# EAGLE board Project_Czepil_Zwolinska (EAGLE 9.2.2)
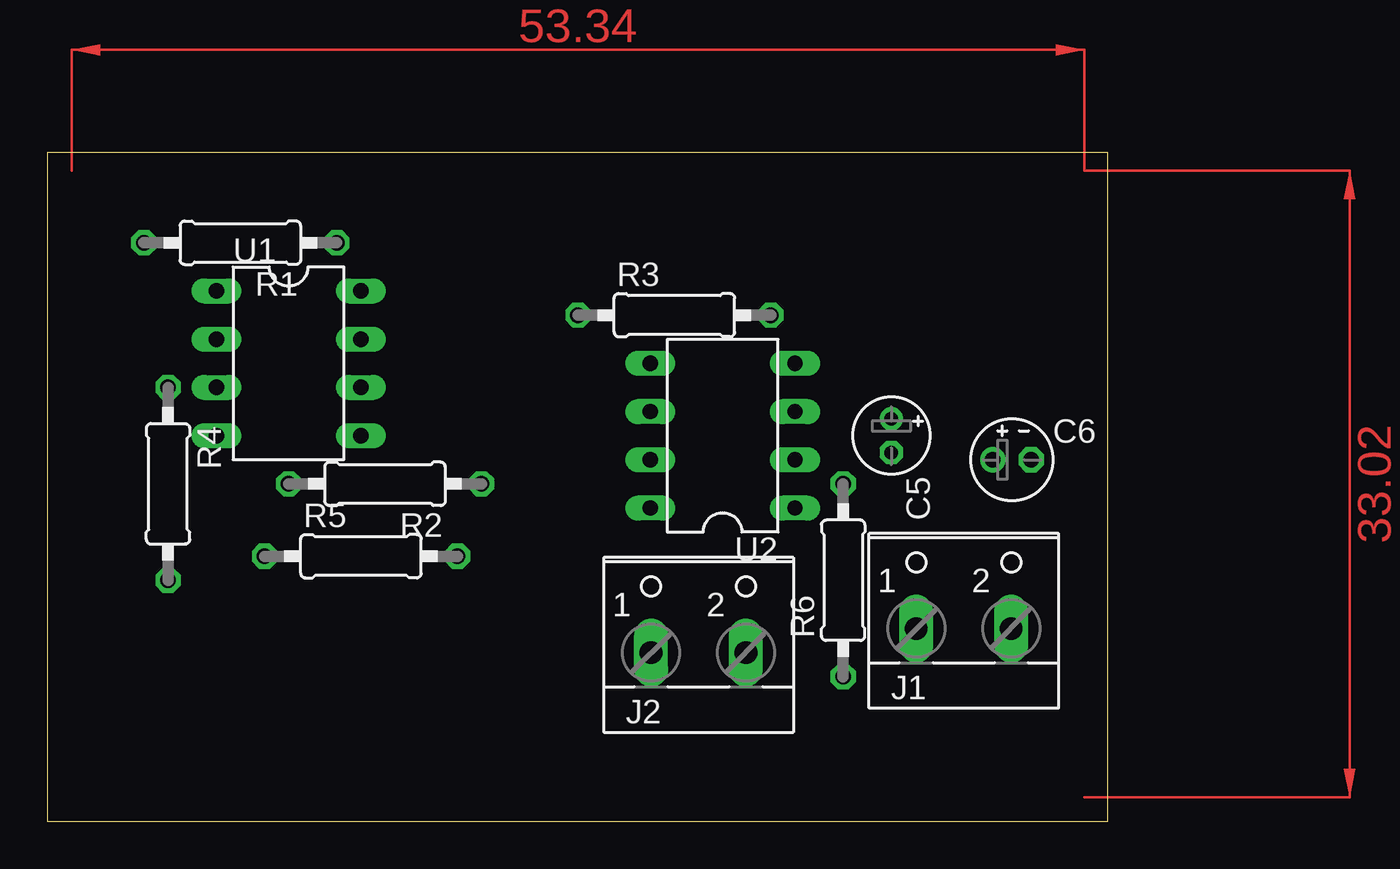
[diagram p0: board, top side]
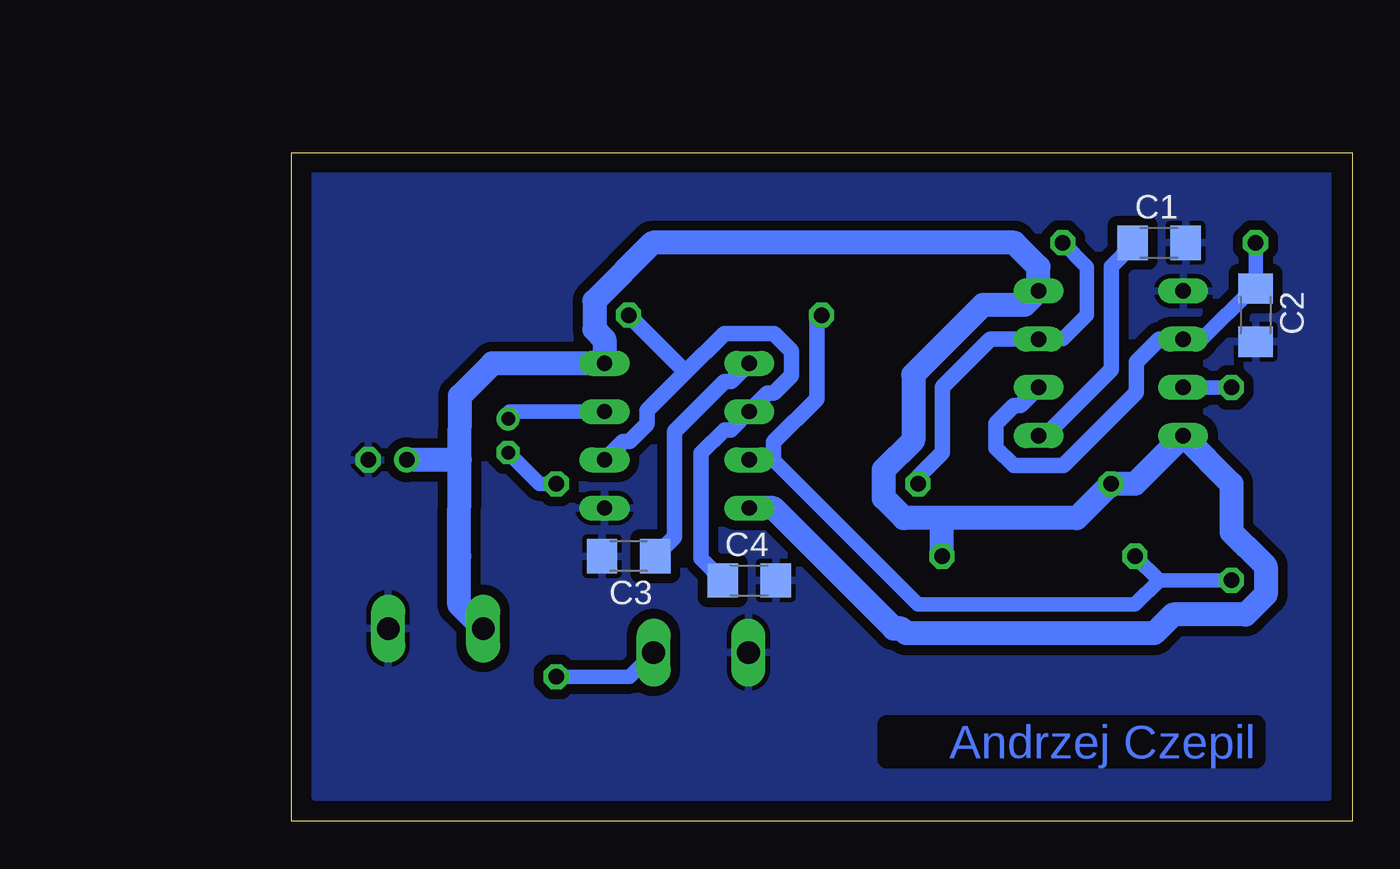
[diagram p1: board, bottom side, seen from below]

Size 55.86 x 35.23 mm. Coordinates in mm from the lower left corner, seen from the top.
Outline: 0,0 55.86,0 55.86,35.23 0,35.23 0,0
Copper layers (1*16): Top 0.035mm / dielectric 1.5mm / Bottom 0.035mm
Design rules "default *": minimum track width 30mil, minimum drill 20mil, track to track 20mil, track to pad 20mil, pad to pad 20mil, via to via 8mil, smd to smd 8mil, copper to edge 40mil, drill to drill 8mil, minimum pad ring 10mil, minimum via ring 8mil, stop-mask expansion 4mil, vias tented up to drill 0mil, thermal gap 10mil

## Footprints (pad centres in the part's own frame; a part is rotated, then mirrored left to right if it is on the bottom)
C1206 = smd 1.6 x 1.8: 1 -1.4,0; 2 1.4,0
E1,8-4 = drill 0.711 pad 1.168: + -0.889,0 | drill 0.711 pad 1.168 octagon: - 0.889,0
E2-4 = drill 0.813 pad 1.27: + -1.016,0 | drill 0.813 pad 1.27 octagon: - 1.016,0
W237-102 = drill 1.194 long: 1 -2.5,-1.27; 2 2.5,-1.27
0207/10 = drill 0.813 octagon: 1 -5.08,0; 2 5.08,0
DIL-08 = drill 0.813 long: 1 -3.81,-3.81; 2 -1.27,-3.81; 3 1.27,-3.81; 4 3.81,-3.81; 5 3.81,3.81; 6 1.27,3.81; 7 -1.27,3.81; 8 -3.81,3.81

## Placement (x,y rotation side)
C1  10n  [C1206]  10.16,30.48 0 bottom
C2  100n  [C1206]  5.08,26.67 270 bottom
C3  10n  [C1206]  38.1,13.97 180 bottom
C4  10n  [C1206]  31.75,12.7 0 bottom
C5  25V 10u  [E1,8-4]  44.45,20.32 270 top
C6  220u 25V  [E2-4]  50.8,19.05 0 top
J1  [W237-102]  48.26,11.43 0 top
J2  [W237-102]  34.29,10.16 0 top
R1  1M  [0207/10]  10.16,30.48 180 top
R2  11k  [0207/10]  17.78,17.78 180 top
R3  11k  [0207/10]  33.02,26.67 0 top
R4  3k6  [0207/10]  6.35,17.78 270 top
R5  330k  [0207/10]  16.51,13.97 0 top
R6  100  [0207/10]  41.91,12.7 90 top
U1  NE555  [DIL-08]  12.7,24.13 270 top
U2  NE555  [DIL-08]  35.56,20.32 90 top

## Library data of the parts
C1-C6 = rcl; SPICEPREFIX: C
J1 J2 = con-wago-500; MPN: 237-102; OC_FARNELL: unknown; OC_NEWARK: 70K9898
R1-R6 = rcl; SPICEPREFIX: R
U1 U2 = Projekt_123; MF: Arrow Electronics; MPN: NE555N; OC_FARNELL: 1467742; OC_NEWARK: 89K1486

## Nets
+12V: C6.+ J1.1 R2.2 R5.2 U1.4 U1.8 U2.4 U2.8
GND: C1.2 C2.2 C3.2 C4.2 C6.- J1.2 J2.1 U1.1 U2.1
N$1: J2.2 R6.1
N$2: C5.- R6.2
N$3: R3.1 R4.2 R5.1 U2.7
N$4: C1.1 U1.5
N$5: R1.1 R2.1 U1.7
N$6: C2.1 R1.2 U1.2 U1.6
N$8: C3.1 U2.5
N$9: C5.+ U2.3
N$10: C4.1 R3.2 U2.2 U2.6
N$12: R4.1 U1.3

## Tracks (layer width: path | path; a pad name or v marks a point on that pad's centre or on a via)
+12V
  Bottom 1.27: 21.59,15.98 14.5,15.98 R2.2 11.43,17.78 U1.4 6.35,17.78 6.35,15.24 5.61,14.5 5.6,14.5 4.55,13.45 4.55,11.95 5.6,10.9 9.42,10.9 10.41,9.91 23.49,9.91 23.75,10.16 24.13,10.16 30.48,16.51 U2.8 | R5.2 21.59,15.98 | J1.1 47.03,11.43 47.02,13.97 47,19.05 | 47,19.05 46.99,22.42 45.28,24.13 U2.4 39.37,25.39 39.9,25.92 39.9,27.42 36.84,30.48 17.78,30.48 17.78,30.47 16.51,29.2 U1.8 17.25,27.2 19.44,27.2 23.11,23.53 23.11,20.08 24.66,18.53 24.66,17.03 23.61,15.98 21.59,15.98 | 47,19.05 C6.+ | C6.+
GND
  pour Bottom: 1.27,1.27 54.61,1.27 54.61,34.29 1.27,34.29
N$1
  Bottom 0.762: R6.1 38.06,7.62 J2.2
N$2
  Bottom 0.762: C5.- 42.8,17.78 R6.2
N$3
  Bottom 0.762: 10.16,12.7 R4.2 | R5.1 10.16,12.7 | 10.16,12.7 11.43,11.43 22.86,11.43 30.48,19.05 U2.7
  Bottom 0.813: R3.1 28.19,26.42 28.19,22.26 30.48,19.97 30.48,19.05
N$4
  Bottom 0.813: C1.1 11.56,30.35 12.67,29.23 12.67,23.81 16.16,20.32 U1.5
N$5
  Bottom 0.762: R1.1 13.97,29.21 13.97,26.67 15.24,25.4 U1.7
  Bottom 0.813: U1.7 19.05,25.4 21.56,22.88 21.56,22.86 21.56,19.44 22.86,18.14 R2.1
N$6
  Bottom 0.762: U1.2 7.91,25.4 5.24,28.07 C2.1 R1.2
  Bottom 0.813: U1.2 10.16,25.4 11.35,24.21 11.35,22.59 15.2,18.74 17.82,18.74 18.75,19.67 18.75,20.97 17.82,21.89 17.48,21.89 U1.6
N$8
  Bottom 0.813: U2.5 32.72,23.16 33.06,23.16 35.69,20.54 35.69,14.98 C3.1
N$9
  Bottom 0.762: C5.+ 44.36,21.59 U2.3
N$10
  Bottom 0.813: U2.2 38.41,20.02 38.06,20.02 37.14,20.94 37.14,21.63 35.1,23.67 | 35.1,23.67 33.06,25.7 30.44,25.7 29.52,24.78 29.52,23.48 30.44,22.55 30.78,22.55 U2.6 32.72,20.62 33.06,20.62 34.29,19.4 34.29,13.84 C4.1 | 35.1,23.67 R3.2 37.97,26.67
N$12
  Bottom 0.762: U1.3 R4.1
(copper drawn outside any net)
  shapes: Top area x2

## Text on the board
Bottom: Andrzej Czepil